# EAGLE board brick_i2c_7seg (EAGLE 7.4.0)
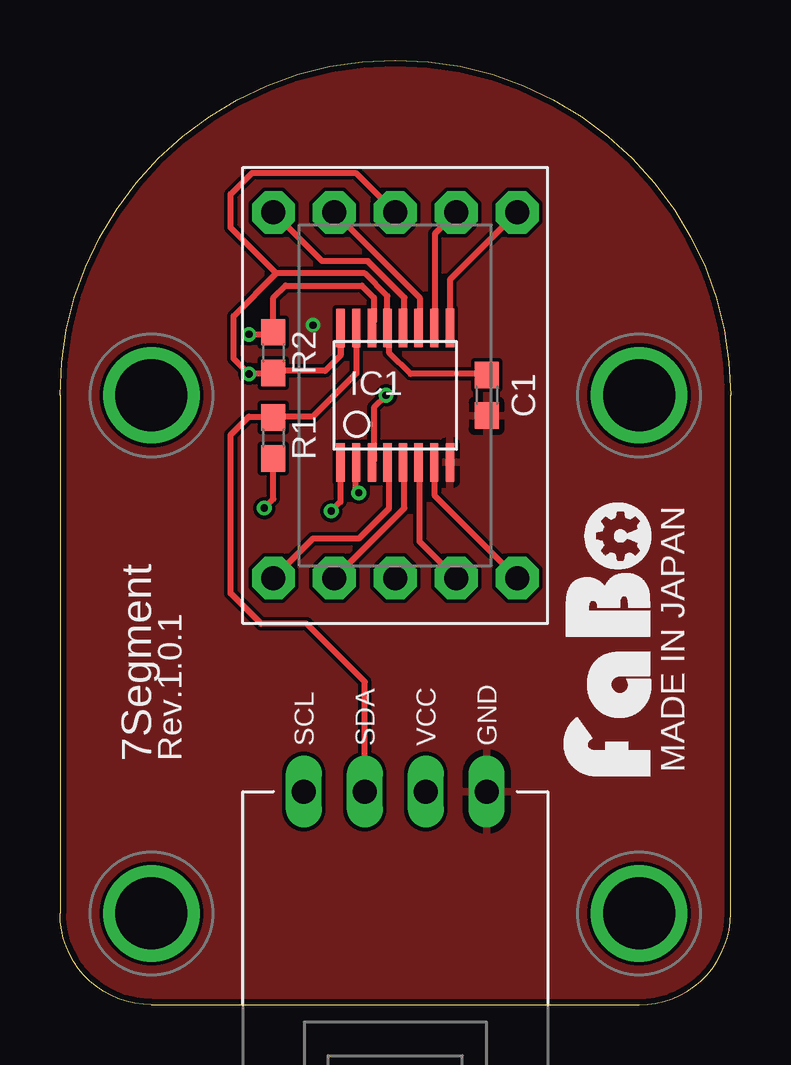
[diagram p0: board, top side]
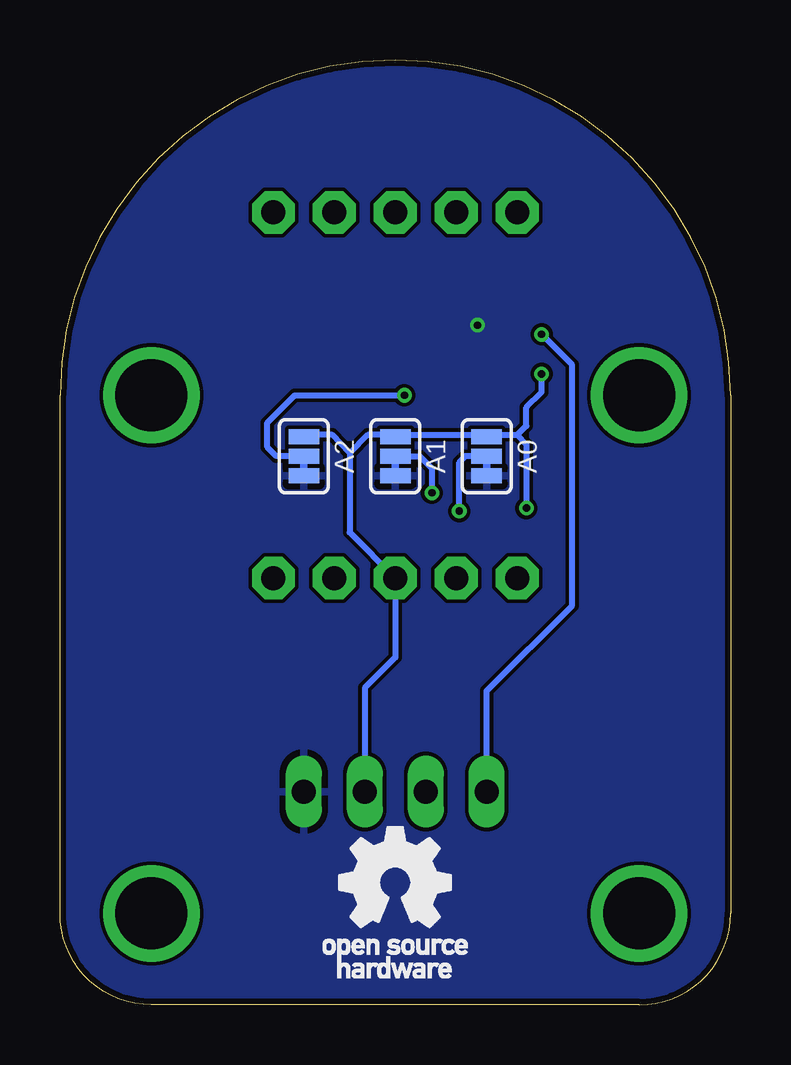
[diagram p1: board, bottom side, seen from below]

Size 27.94 x 39.37 mm. Coordinates in mm from the lower left corner, seen from the top.
Copper layers (1*16): Top 0.035mm / dielectric 1.5mm / Bottom 0.035mm
Design rules "Elecrow_2-layer_eagle_rule": minimum track width 6mil, minimum drill 12mil, track to track 6mil, track to pad 6mil, pad to pad 6mil, via to via 6mil, smd to smd 0mil, copper to edge 10mil, drill to drill 10mil, minimum pad ring 10mil, minimum via ring 6mil, stop-mask expansion 2mil, vias tented up to drill 100mil, thermal gap 10mil

## Footprints (pad centres in the part's own frame; a part is rotated, then mirrored left to right if it is on the bottom)
SMD-JUMPER-3 = smd 0.635 x 1.27: 1 -0.813,0; 2 0,0; 3 0.813,0
EIA0603 = smd 1.1 x 1: 1 -0.85,0; 2 0.85,0
TSSOP16 = smd 0.35 x 1.6: 1 -2.275,-2.8; 2 -1.625,-2.8; 3 -0.975,-2.8; 4 -0.325,-2.8; 5 0.325,-2.8; 6 0.975,-2.8; 7 1.625,-2.8; 8 2.275,-2.8; 9 2.275,2.8; 10 1.625,2.8; 11 0.975,2.8; 12 0.325,2.8; 13 -0.325,2.8; 14 -0.975,2.8; 15 -1.625,2.8; 16 -2.275,2.8
BRICK_I2C = drill 1 long: GND 3.81,-10.16; SCL -3.81,-10.16; SDA -1.27,-10.16; VCC 1.27,-10.16 | drill 3 pad 3.81: P$1 -10.16,6.35; P$2 10.16,6.35; P$3 -10.16,-15.24; P$4 10.16,-15.24
A-551SRD = drill 1 pad 1.778 octagon: A 2.54,7.62; ANO1 0,-7.62; ANO2 0,7.62; B 5.08,7.62; C 2.54,-7.62; D -2.54,-7.62; DP 5.08,-7.62; E -5.08,-7.62; F -2.54,7.62; G -5.08,7.62

## Placement (x,y rotation side)
A0  [SMD-JUMPER-3]  10.16,22.86 270 bottom
A1  [SMD-JUMPER-3]  13.97,22.86 270 bottom
A2  [SMD-JUMPER-3]  17.78,22.86 270 bottom
C1  0.1uF  [EIA0603]  17.78,25.4 270 top
IC1  TLC59208F  [TSSOP16]  13.97,25.4 0 top
J1  [BRICK_I2C]  13.97,19.05 0 top
R1  4.7k  [EIA0603]  8.89,23.62 270 top
R2  4.7k  [EIA0603]  8.89,27.18 270 top
U$2  A-551SRD  [A-551SRD]  13.97,25.4 0 top
U$3  [LOGO_FABO_M]  24.64,15.24 90 top
U$4  [LOGO_OSHW_T_M_BOTTOM]  13.97,5.08 0 top

## Library data of the parts
A0 A1 A2 C1 IC1 J1 R1 R2 U$2 U$4 = GClue
U$3 = FaBo

## Nets
3V3: A0.1 A1.1 A2.1 C1.1 IC1.13 IC1.16 J1.VCC R1.2 R2.2 U$2.ANO1 U$2.ANO2
A0: A0.2 IC1.1
A1: A1.2 IC1.2
A2: A2.2 IC1.3
GND: A0.3 A1.3 A2.3 C1.2 IC1.8 J1.GND
N$1: IC1.4 U$2.E
N$2: IC1.5 U$2.D
N$3: IC1.6 U$2.C
N$4: IC1.7 U$2.DP
N$5: IC1.9 U$2.B
N$6: IC1.10 U$2.A
N$7: IC1.11 U$2.F
N$8: IC1.12 U$2.G
SCL: IC1.14 J1.SCL R2.1
SDA: IC1.15 J1.SDA R1.1

## Tracks (layer width: path | path; a pad name or v marks a point on that pad's centre or on a via)
3V3  (via drill 0.3)
  Top 0.254: C1.1 17.57,26.25 17.53,26.29 14.61,26.29 13.72,27.18 13.72,28.13 IC1.13 13.64,29.54 12.7,30.48 9.02,30.48 | 9.02,30.48 7.11,32.38 7.11,33.78 8,34.67 12.32,34.67 U$2.ANO2 | v8.51,20.7 8.89,21.08 R1.2 | 8.64,26.29 8.85,26.29 R2.2 8.98,26.42 | 11.68,27.05 11.68,27.69 11.7,27.7 IC1.16 11.7,27.06 11.68,27.05 | 11.68,27.05 11.05,26.42 8.98,26.42 | 8.98,26.42 8.76,26.42 8.64,26.29 | 8.64,26.29 v7.87,26.29 7.24,26.92 7.24,28.7 9.02,30.48
  Bottom 0.254: J1.VCC 15.24,13.21 13.97,14.48 U$2.ANO1 15.88,19.68 15.88,22.99 | 15.88,22.99 16.59,23.75 17.65,23.75 A2.1 | 15.88,22.99 15.11,23.75 14.1,23.75 A1.1 13.84,23.75 10.29,23.75 A0.1 10.11,23.67 10.03,23.75 8.89,23.75 | 8.89,23.75 8.51,23.37 v8.51,20.7 | 8.89,23.75 8.51,24.13 8.51,24.89 7.87,25.53 v7.87,26.29
A0  (via drill 0.3)
  Top 0.254: IC1.1 11.68,20.95 v11.3,20.57
  Bottom 0.254: A0.2 11.05,22.86 11.3,22.61 v11.3,20.57
A1  (via drill 0.3)
  Top 0.254: v12.45,21.34 12.32,21.46 12.32,22.37 IC1.2
  Bottom 0.254: A1.2 12.95,22.86 12.45,22.35 v12.45,21.34
A2  (via drill 0.3)
  Top 0.254: v13.59,25.4 13.08,24.89 13.08,22.69 IC1.3
  Bottom 0.254: A2.2 18.92,22.86 19.3,23.24 19.3,24.26 18.16,25.4 v13.59,25.4
GND  (via drill 0.3)
  other vias: 10.54,28.32
  pour Bottom: -1.27,-1.27 29.21,-1.27 29.21,40.64 -1.27,40.64
  pour Top: -1.27,-1.27 29.21,-1.27 29.21,40.64 -1.27,40.64
N$1
  Top 0.254: U$2.E 10.54,19.43 12.45,19.43 13.72,20.7 13.72,21.97 13.64,22.04 IC1.4
N$2
  Top 0.254: U$2.D 14.35,20.7 14.35,21.84 14.29,21.9 IC1.5
N$3
  Top 0.254: U$2.C 14.99,19.3 14.99,21.97 14.95,22.01 IC1.6
N$4
  Top 0.254: IC1.7 15.6,21.23 U$2.DP
N$5
  Top 0.254: U$2.B 16.25,30.21 IC1.9
N$6
  Top 0.254: U$2.A 15.62,32.13 15.62,28.83 15.6,28.8 IC1.10
N$7
  Top 0.254: U$2.F 14.99,29.46 14.99,28.7 14.95,28.49 IC1.11
N$8
  Top 0.254: IC1.12 14.29,28.76 14.35,28.7 14.35,29.46 12.83,30.99 10.92,30.99 U$2.G
SCL  (via drill 0.3)
  Top 0.254: IC1.14 13.08,28.5 13.08,29.46 12.57,29.97 9.4,29.97 8.89,29.46 R2.1 8.8,27.94 v7.87,27.94
  Bottom 0.254: J1.SCL 10.16,13.08 6.6,16.64 6.6,26.67 v7.87,27.94
SDA
  Top 0.254: IC1.15 12.35,26.32 10.54,24.51 8.93,24.51 R1.1 8.85,24.51 7.87,24.51 7.11,23.75 7.11,17.14 8.38,15.88 10.29,15.88 12.7,13.46 J1.SDA

## Text on the board
tPlace: MADE IN JAPAN | 7Segment | Rev.1.0.1